# EAGLE board Procesor-Attiny84 (EAGLE 9.4.0)
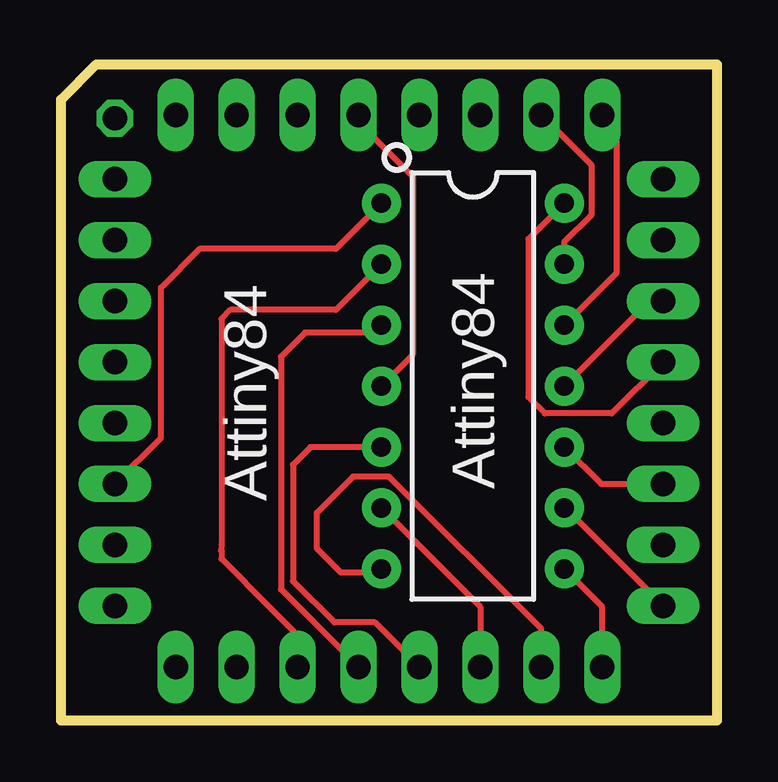
[diagram p0: board, top side]
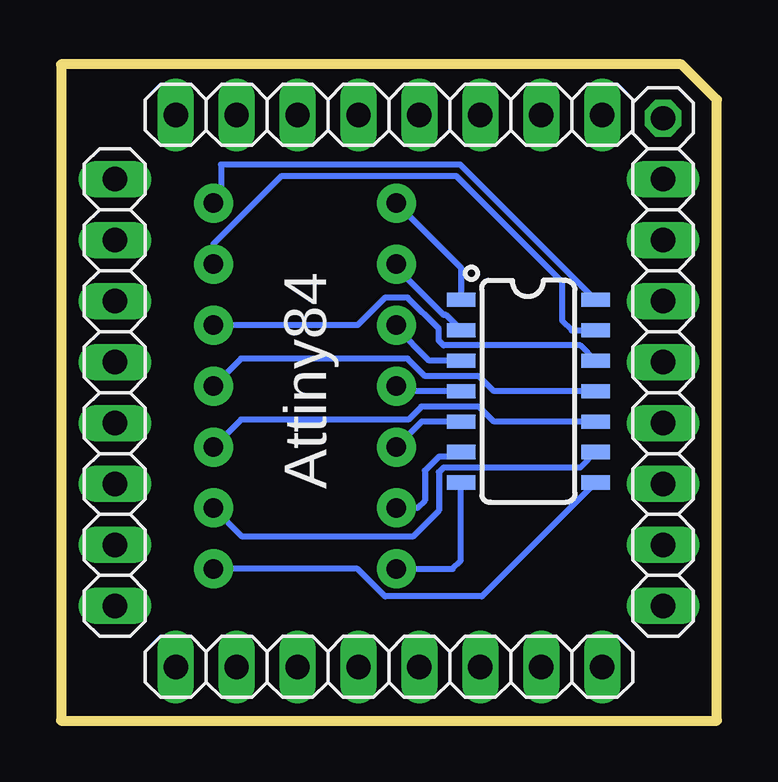
[diagram p1: board, bottom side, seen from below]

Size 27.34 x 27.34 mm. Coordinates in mm from the lower left corner, seen from the top.
Outline: 0,25.87 1.47,27.34 27.34,27.34 27.34,0 0,0 0,25.87
Copper layers (1*16): Top 0.035mm / dielectric 1.5mm / Bottom 0.035mm
Design rules "default *": minimum track width 10mil, minimum drill 24mil, track to track 8mil, track to pad 8mil, pad to pad 8mil, via to via 8mil, smd to smd 8mil, copper to edge 10mil, drill to drill 8mil, minimum pad ring 10mil, minimum via ring 8mil, stop-mask expansion 4mil, vias tented up to drill 0mil, thermal gap 10mil

## Footprints (pad centres in the part's own frame; a part is rotated, then mirrored left to right if it is on the bottom)
DIP14 = drill 0.813 pad 1.626: 1 -7.62,-3.81; 2 -5.08,-3.81; 3 -2.54,-3.81; 4 0,-3.81; 5 2.54,-3.81; 6 5.08,-3.81; 7 7.62,-3.81; 8 7.62,3.81; 9 5.08,3.81; 10 2.54,3.81; 11 0,3.81; 12 -2.54,3.81; 13 -5.08,3.81; 14 -7.62,3.81
1X01 = drill 1.016 octagon: 1 0,0
SO14 = smd 0.6 x 1.2: 1 -3.175,-2.8; 2 -1.905,-2.8; 3 -0.635,-2.8; 4 0.635,-2.8; 5 1.905,-2.8; 6 3.175,-2.8; 7 4.445,-2.8; 8 4.445,2.8; 9 3.175,2.8; 10 1.905,2.8; 11 0.635,2.8; 12 -0.635,2.8; 13 -1.905,2.8; 14 -3.175,2.8
1X08 = drill 1.016 long: 1 -8.89,0; 2 -6.35,0; 3 -3.81,0; 4 -1.27,0; 5 1.27,0; 6 3.81,0; 7 6.35,0; 8 8.89,0

## Placement (x,y rotation side)
E$1  [DIP14]  17.17,13.94 270 top
E$2  [1X01]  2.24,25.1 0 bottom
E$3  [SO14]  7.85,14.36 270 bottom
E$9  [1X08]  2.24,13.67 90 bottom
E$10  [1X08]  13.67,25.24 0 bottom
E$11  [1X08]  25.1,13.67 270 bottom
E$12  [1X08]  13.67,2.24 180 bottom

## Library data of the parts
E$1 E$3 = SparkFun-IC-Microcontroller
E$2 E$9-E$12 = pinhead

## Nets
S$2: E$1.4 E$3.4 E$10.5
S$3: E$1.14 E$3.14 E$11.4
S$4: E$1.1 E$3.1 E$9.3
S$5: E$1.9 E$3.9 E$11.8
S$6: E$1.12 E$3.12 E$10.1
S$7: E$1.13 E$3.13 E$10.2
S$8: E$1.7 E$3.7 E$12.7
S$10: E$1.8 E$3.8 E$12.8
S$11: E$1.10 E$3.10 E$11.6
S$12: E$1.11 E$3.11 E$11.3
S$13: E$1.2 E$3.2 E$12.3
S$14: E$1.3 E$3.3 E$12.4
S$15: E$1.5 E$3.5 E$12.5
S$18: E$1.6 E$3.6 E$12.6

## Tracks (layer width: path | path; a pad name or v marks a point on that pad's centre or on a via)
S$2
  Top 0.254: E$1.4 14.67,15.25 14.67,22.67 12.4,24.94 E$10.5
  Bottom 0.254: E$3.4 13.14,13.72 E$1.4
S$3
  Top 0.254: E$11.4 22.96,12.8 20.17,12.8 19.48,13.48 19.48,20.06 E$1.14
  Bottom 0.254: E$3.14 10.69,23.17 20.67,23.17 20.67,21.87 E$1.14
S$4
  Top 0.254: E$1.1 11.46,19.66 5.79,19.66 4.17,18.04 4.17,11.79 E$9.3
  Bottom 0.254: E$3.1 10.65,18.86 E$1.1
S$5
  Top 0.254: E$1.9 21.02,8.86 E$11.8
  Bottom 0.254: E$3.9 5.7,10.54 11.39,10.54 11.59,10.35 11.59,8.75 12.67,7.67 19.79,7.67 E$1.9
S$6
  Top 0.254: E$1.12 23.17,18.67 23.17,24.63 E$10.1
  Bottom 0.254: E$3.12 5.7,15.63 11.39,15.63 11.59,15.83 11.59,16.32 12.89,17.62 13.83,17.62 14.98,16.48 E$1.12
S$7
  Top 0.254: E$1.13 20.98,19.94 22.12,21.09 22.12,23.14 E$10.2
  Bottom 0.254: E$1.13 20.98,19.86 18.14,22.7 10.87,22.7 6.45,18.28 6.45,16.67 6.04,16.27 E$3.13
S$8
  Top 0.254: E$1.7 13.21,6.17 11.67,6.17 10.67,7.17 10.67,8.67 12.17,10.17 13.67,10.17 20.02,3.82 E$12.7
  Bottom 0.254: E$1.7 11.02,6.32 10.67,6.67 10.67,9.9 E$3.7
S$10
  Top 0.254: E$1.8 22.56,4.74 E$12.8
  Bottom 0.254: E$1.8 14.98,6.32 13.83,5.18 9.79,5.18 E$3.8
S$11
  Top 0.254: E$1.10 22.52,9.86 E$11.6
  Bottom 0.254: E$3.10 9.29,12.46 9.92,13.09 12.32,13.09 12.86,12.54 19.84,12.54 E$1.10
S$12
  Top 0.254: E$1.11 24.52,17.48 E$11.3
  Bottom 0.254: E$3.11 9.29,13.72 9.92,14.36 12.16,14.36 12.89,15.08 19.84,15.08 E$1.11
S$13
  Top 0.254: E$1.2 11.46,17.11 7.06,17.11 6.68,16.74 6.68,7.34 6.67,7.09 6.68,7.08 6.68,6.74 8.71,4.71 9.86,3.56 E$12.3
  Bottom 0.254: E$3.2 11.29,16.91 11.39,16.91 13.36,18.87 E$1.2
S$14
  Top 0.254: E$1.3 13.05,16.17 10.17,16.17 9.17,15.17 9.17,5.47 E$12.4
  Bottom 0.254: E$3.3 11.99,14.99 13.36,16.36 E$1.3
S$15
  Top 0.254: E$1.5 10.4,11.4 9.67,10.67 9.67,5.82 11.39,4.09 13.09,4.09 E$12.5
  Bottom 0.254: E$3.5 12.3,12.46 E$1.5
S$18
  Top 0.254: E$1.6 17.11,5.11 17.48,4.74 E$12.6
  Bottom 0.254: E$1.6 12.48,8.86 12.17,9.17 12.17,10.41 11.58,11 10.84,11 E$3.6

## Text on the board
tPlace: Attiny84 | Attiny84
bPlace: Attiny84